# Allegro board ee157lab2_crystal_oscillator.brd
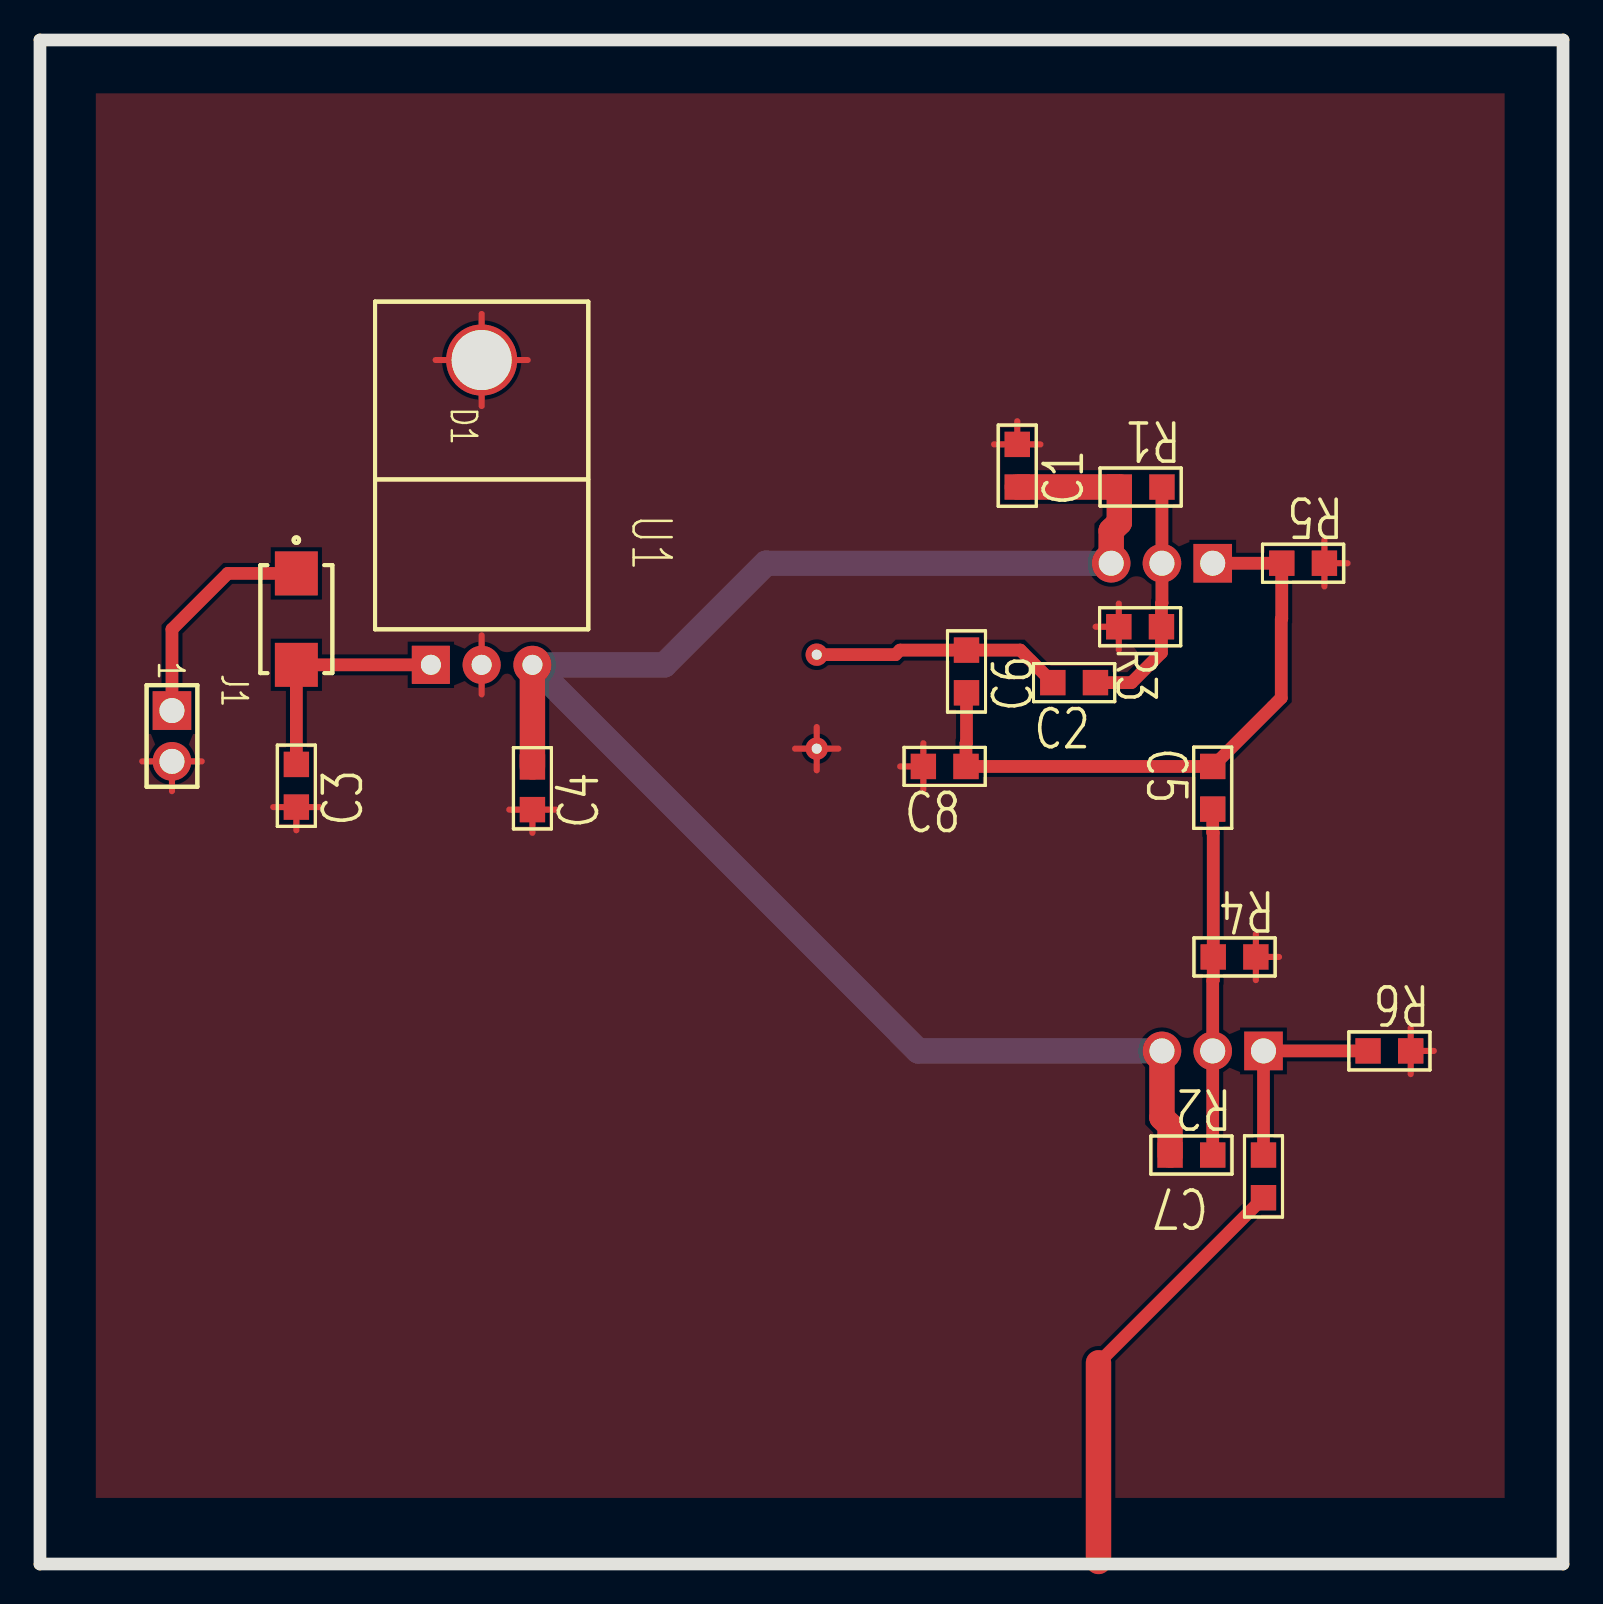
[diagram p0: board, top side]
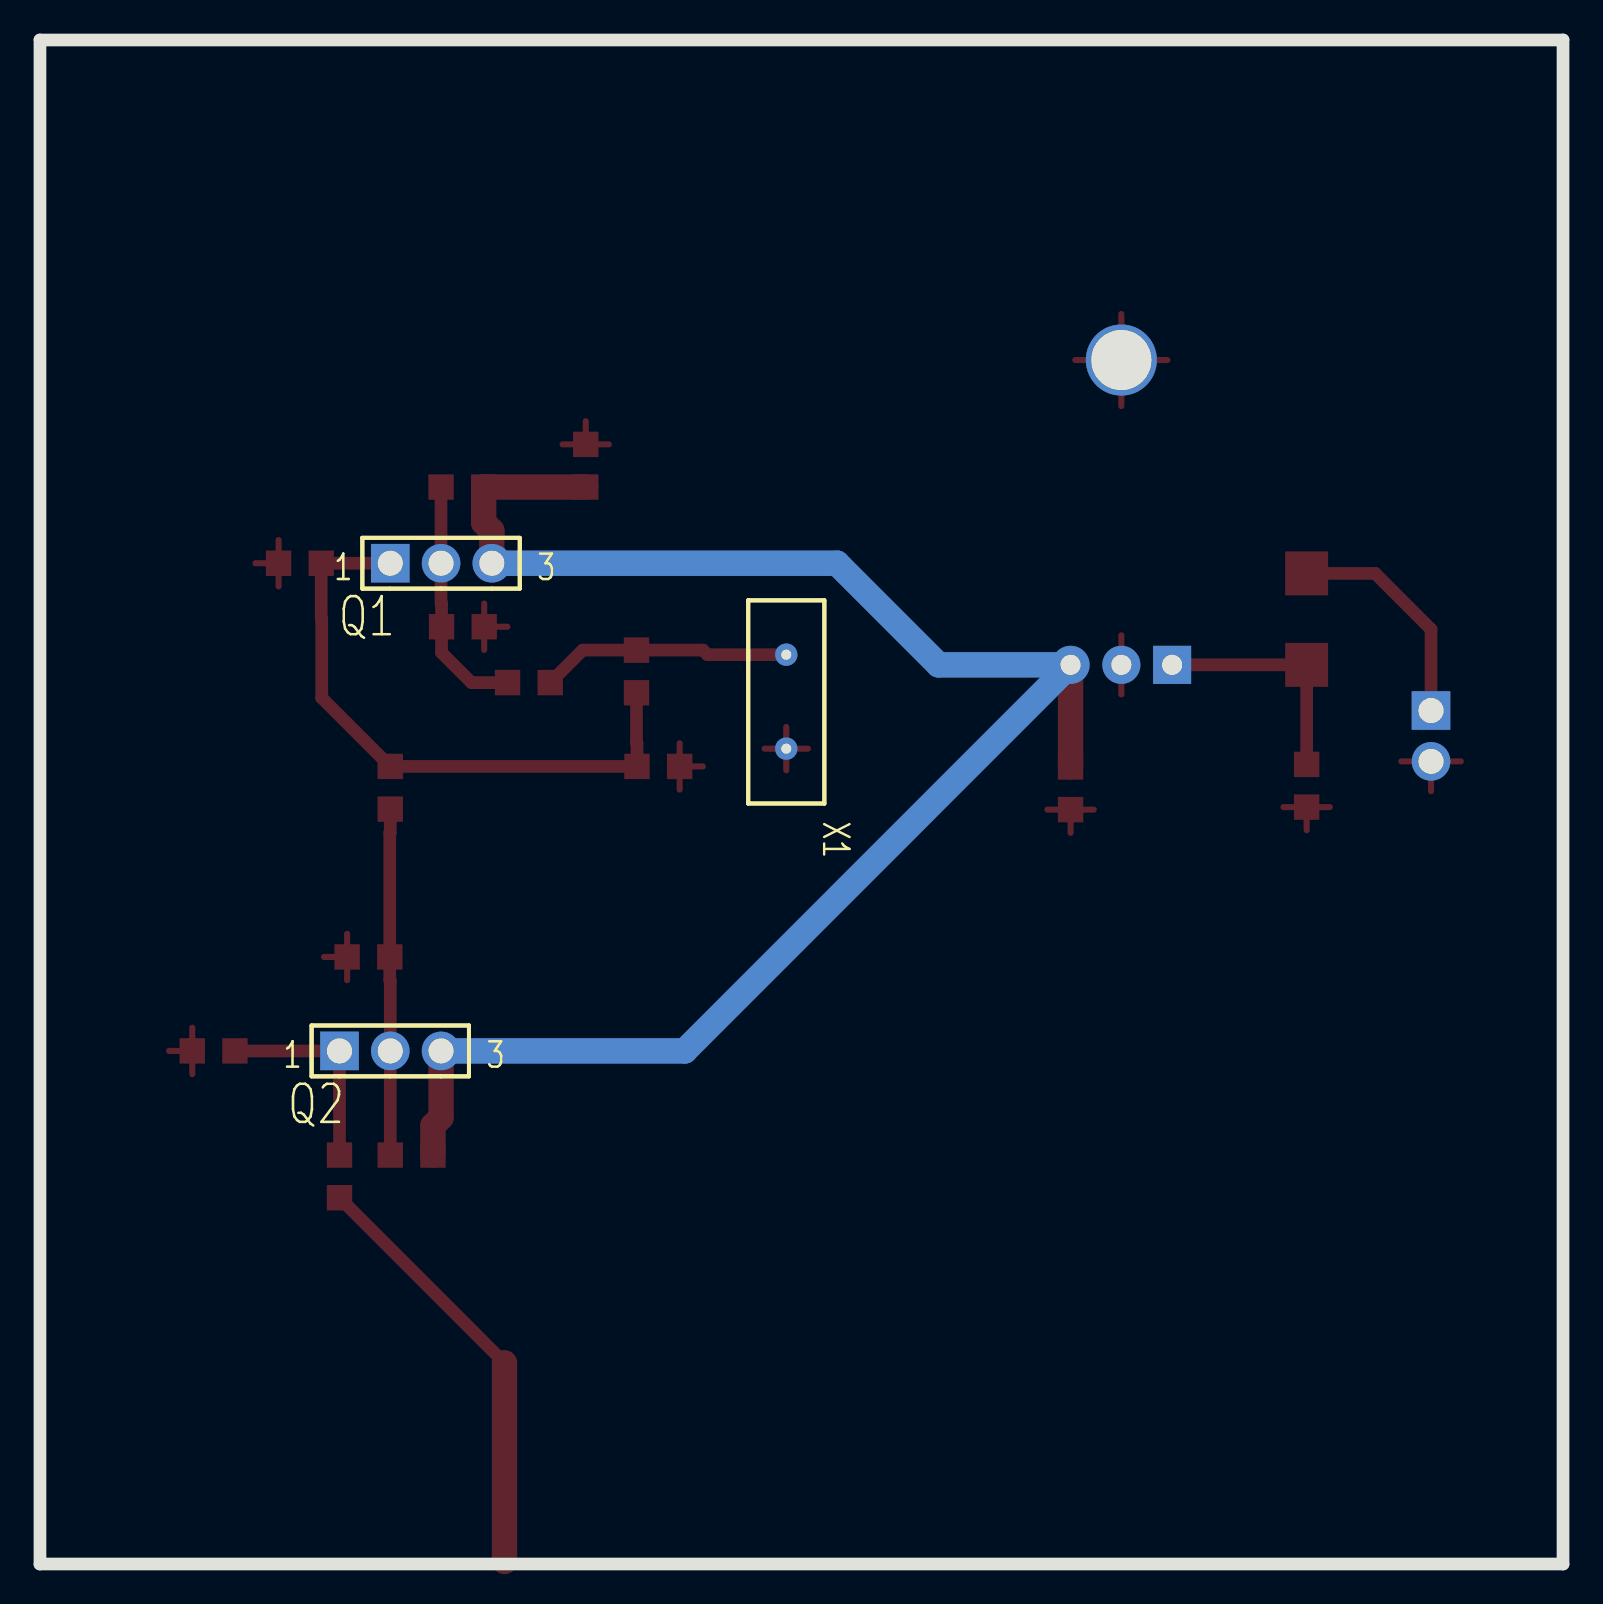
[diagram p1: board, bottom side, seen from below]

Outline 76.2 x 76.2 mm; copper layers: TOP, BOTTOM. Coordinates in mm from the lower left corner of the outline.
Outline path: 0,76.2 0,0 ; 0,76.2 0,0 ; 0,76.2 76.2,76.2 ; 0,76.2 76.2,76.2 ; 0,0 76.2,0 ; 0,0 76.2,0 ; 76.2,0 76.2,76.2 ; 76.2,0 76.2,76.2

## Placement (name value [footprint] x y rotation side)
C1  0.1u  [SMC0805]  48.9 53.85 90 top
C2  0.1u  [SMC0805]  50.67 44.07 0 top
C3  0.1u  [SMC0805]  12.83 37.85 90 top
C4  0.3u  [SMC0805]  24.64 37.72 90 top
C5  22p  [SMC0805]  58.67 39.88 270 top
C6  150p  [SMC0805]  46.35 43.56 90 top
C7  22p  [SMC0805]  61.21 20.45 270 top
C8  150p  [SMC0805]  44.2 39.88 0 top
D1  D  [SMB]  12.83 47.24 270 top
J1  2Pin Header  [BCON_2X1V_100S_1SQ_42D]  6.6 42.67 270 top
Q1  2N3904  [BCON_3X1V_100S_1SQ_42D]  56.13 50.04 180 bottom
Q2  2N3904  [BCON_3X1V_100S_1SQ_42D]  58.67 25.65 180 bottom
R1  82k  [SMR0805]  56.13 53.85 180 top
R2  82k  [SMR0805]  58.67 20.45 180 top
R3  120k  [SMR0805]  53.97 46.86 0 top
R4  120k  [SMR0805]  60.83 30.35 180 top
R5  4.7k  [SMR0805]  64.26 50.04 180 top
R6  4.7k  [SMR0805]  68.58 25.65 180 top
U1  L7812/TO220  [TO220_H1234]  19.56 44.96 270 top
X1  ATS100B  [X_400L_140W_185LS_20D]  38.86 45.47 270 bottom

## Library data of the parts
C1-C8 = C
D1 = D
J1 = 2Pin Header
Q1 Q2 = 2N3904_0
R1-R6 = R
U1 = L7812/TO220_4
X1 = ATS100B: Tolerance: TOL; User Part Number: UPN

## Footprints (pads in the part's own frame, mm; a bottom-side part is the same pattern mirrored in y, then rotated)
BCON_2X1V_100S_1SQ_42D
  rect 1.93x1.93 hole 1.25: 1(0,0)
  round 1.93 hole 1.25: 2(2.54,0)
BCON_3X1V_100S_1SQ_42D
  rect 1.93x1.93 hole 1.25: 1(-2.54,0)
  round 1.93 hole 1.25: 2(0,0) 3(2.54,0)
SMB
  rect 2.2x2.149 smd: 1(-2.286,0) 2(2.286,0)
SMC0805
  rect 1.27x1.27 smd: 1(0,0) 2(2.134,0)
SMR0805
  rect 1.27x1.27 smd: 1(0,0) 2(2.134,0)
TO220_H1234
  rect 1.905x1.905 hole 1.001: 1(0,0)
  round 1.905 hole 1.001: 2(0,2.54) 3(0,5.08)
  round 3.556 hole 3: 4(-15.24,2.54)
X_400L_140W_185LS_20D
  round 1.118 hole 0.5: 1(0,0) 2(4.699,0)

## Nets
GND: C1.2 C3.1 C4.1 C8.1 J1.2 R3.1 R4.1 R5.1 R6.1 U1.2(GND#2) U1.4(GND#4) X1.2
VCC: C1.1 C4.2 Q1.3(COLLECTOR) Q2.3(COLLECTOR) R1.2 R2.2 U1.3(VCC)
N00368: C5.1 C6.1 C8.2 Q1.1(EMITTER) R5.2
N00381: C2.2 Q1.2(BASE) R1.1 R3.2
N00417: C2.1 C6.2 X1.1
N01012: C5.2 Q2.2(BASE) R2.1 R4.2
N01182: C7.1 Q2.1(EMITTER) R6.2
N02216: C3.2 D1.2(C) U1.1(VIN)
N02635: C7.2
N08587: D1.1(A) J1.1

## Routing (per net, layer and track width the routed paths; a pad name or vN(x,y) marks a point on that pad's centre or on a via; arc(x,y) is an arc through that point)
GND: length 48.7
  TOP w0.305: U1.4 22.1,62.5 ; U1.4 24.4,60.2 ; U1.4 19.8,60.2 ; U1.4 22.1,57.9 ; R4.1 61.99,30.35 ; R4.1 60.83,31.51 ; R4.1 60.83,29.19 ; R5.1 64.26,51.2 ; R5.1 64.26,48.88 ; R5.1 65.42,50.04 ; 52.82,46.86 R3.1 ; R3.1 53.97,45.7 ; R3.1 53.97,48.02 ; 24.64,36.56 C4.1 ; C4.1 23.48,37.72 ; C4.1 25.8,37.72 ; X1.2 38.86,41.85 ; X1.2 39.94,40.77 ; X1.2 37.78,40.77 ; X1.2 38.86,39.68 ; 6.6,38.64 J1.2 ; J1.2 5.12,40.13 ; J1.2 8.09,40.13 ; R6.1 69.74,25.65 ; R6.1 68.58,24.5 ; R6.1 68.58,26.81 ; C1.2 50.05,55.98 ; C1.2 48.9,57.14 ; C1.2 47.74,55.98 ; C8.1 44.2,41.04 ; C8.1 44.2,38.72 ; C8.1 43.04,39.88 ; 22.1,46.43 U1.2 22.1,43.48 ; 11.67,37.85 C3.1 ; C3.1 13.99,37.85 ; C3.1 12.83,36.69
VCC: length 90.1
  TOP w1.27: Q2.3 56.13,22.33 56.54,21.92 R2.2 ; C1.1 R1.2 54,52.07 53.59,51.66 Q1.3 ; U1.3 C4.2
  BOTTOM w1.27: Q1.3 36.32,50.04 31.24,44.96 U1.3 43.94,25.65 Q2.3
N00368: length 31.1
  TOP w0.635: C6.1 46.35,41.06 46.33,41.04 C8.2 C5.1 62.1,43.31 62.1,47.24 62.13,47.27 R5.2 Q1.1
N00381: length 12.2
  TOP w0.635: C2.2 54.61,44.07 56.11,45.57 R3.2 56.11,48.02 56.13,48.05 Q1.2 R1.1
N00417: length 12.6
  TOP w0.635: X1.1 42.8,45.47 43.03,45.69 C6.2 49.05,45.69 C2.1
N01012: length 17.3
  TOP w0.635: C5.2 58.67,36.59 58.7,36.56 R4.2 58.7,29.19 58.67,29.17 Q2.2 R2.1
N01182: length 10.4
  TOP w0.635: R6.2 Q2.1 C7.1
N02216: length 11.7
  TOP w0.635: U1.1 D1.2 C3.2
N02635: length 21.6
  TOP w0.635: 52.96,10.06 C7.2
  TOP w1.27: 52.96,0.13 52.96,10.06
N08587: length 11.4
  TOP w0.635: J1.1 6.6,46.74 9.4,49.53 D1.1

## Copper pours and planes (outline as drawn; the poured copper is in the pictures)
GND on TOP: 73.28,73.53 73.28,3.3 2.79,3.3 2.79,73.53 ; 3 cut-outs

## Text on the board
BOTTOM: BOTTOM
Board Geometry/Soldermask Bottom: SMB
Ref Des/Silkscreen Bottom: SSB
TOP: TOP
Board Geometry/Soldermask Top: SMT
Ref Des/Silkscreen Top: SST
NCLEGEND-1-2: FIGURE | SIZE | 19.7 | 39.4 | 49.2 | 118.1 | DRILL CHART: TOP to BOTTOM | ALL UNITS ARE IN MILS | PLATED | QTY | 2 | 3 | 10 | 1
User.6: MECH
